# EAGLE board fnordlichtmini_v4 (EAGLE 6.1)
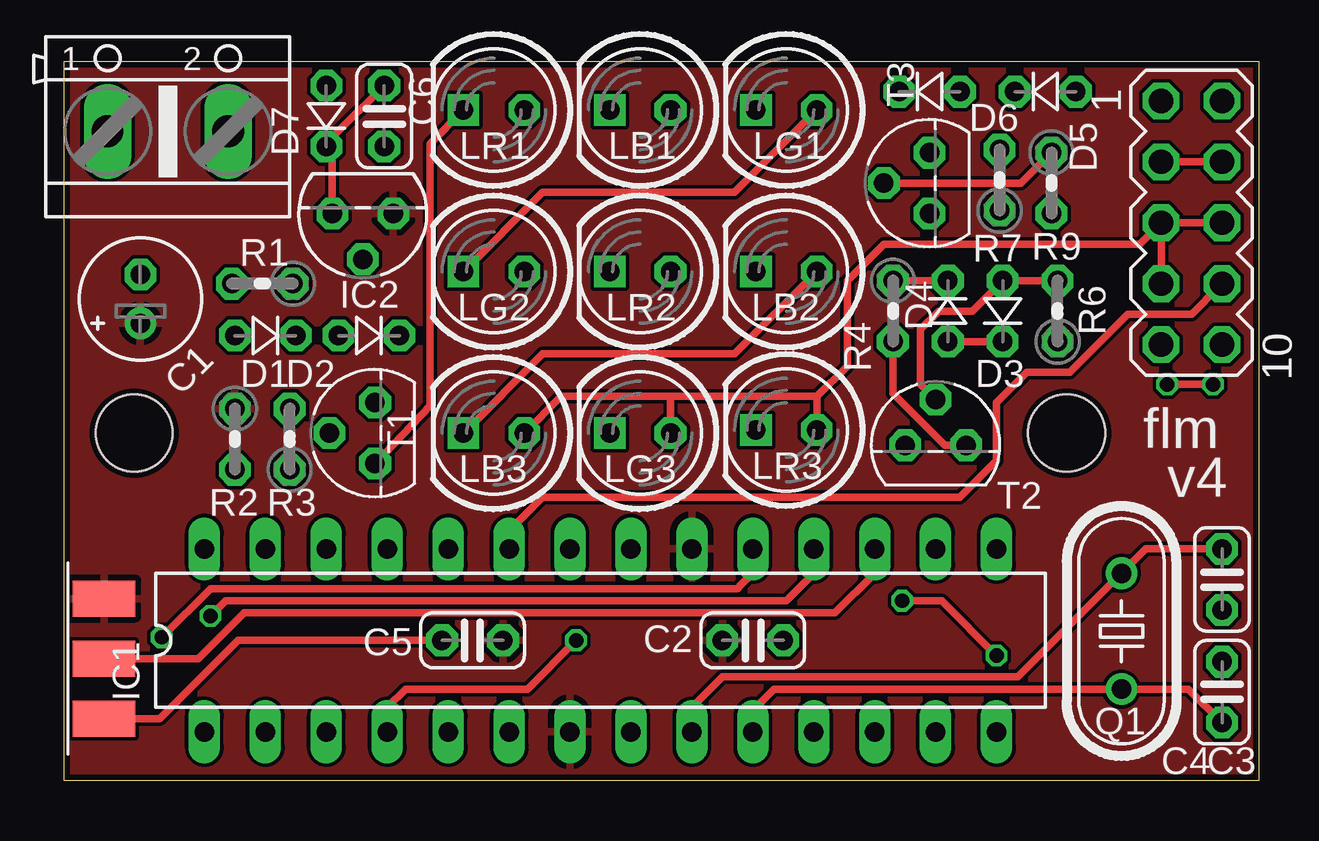
[diagram p0: board, top side]
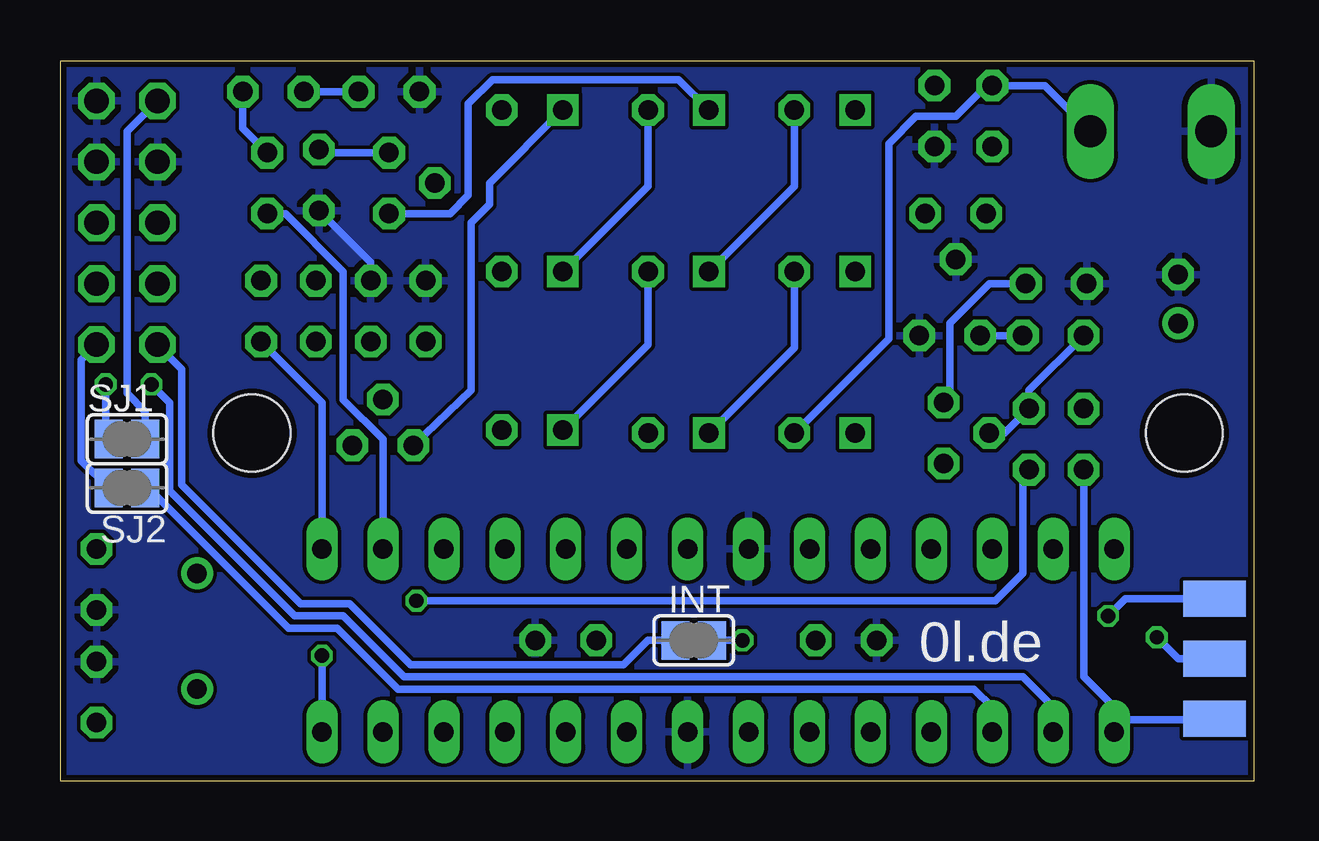
[diagram p1: board, bottom side, seen from below]

Size 49.78 x 29.97 mm. Coordinates in mm from the lower left corner, seen from the top.
Outline: 49.78,0 0,0 0,29.97 49.78,29.97 49.78,0
Copper layers (1*16): Top 0.035mm / dielectric 1.5mm / Bottom 0.035mm
Design rules: minimum track width 6mil, minimum drill 12mil, track to track 6mil, track to pad 6mil, pad to pad 6mil, via to via 6mil, smd to smd 0mil, copper to edge 10mil, drill to drill 10mil, minimum pad ring 10mil, minimum via ring 6mil, stop-mask expansion 2mil, vias tented up to drill 100mil, thermal gap 10mil
Holes 3.2 mm at 2.92,14.48 41.78,14.48

## Footprints (pad centres in the part's own frame; a part is rotated, then mirrored left to right if it is on the bottom)
E2-5 = drill 0.813 pad 1.27: + -1.016,0 | drill 0.813 pad 1.27 octagon: - 1.016,0
C025-024X044 = drill 0.813 octagon: 1 -1.27,0; 2 1.27,0
D-2.5 = drill 0.813 octagon: A 1.27,0; C -1.27,0
DIL28-3 = drill 0.813 long: 1 -16.51,-3.81; 2 -13.97,-3.81; 3 -11.43,-3.81; 4 -8.89,-3.81; 5 -6.35,-3.81; 6 -3.81,-3.81; 7 -1.27,-3.81; 8 1.27,-3.81; 9 3.81,-3.81; 10 6.35,-3.81; 11 8.89,-3.81; 12 11.43,-3.81; 13 13.97,-3.81; 14 16.51,-3.81; 15 16.51,3.81; 16 13.97,3.81; 17 11.43,3.81; 18 8.89,3.81; 19 6.35,3.81; 20 3.81,3.81; 21 1.27,3.81; 22 -1.27,3.81; 23 -3.81,3.81; 24 -6.35,3.81; 25 -8.89,3.81; 26 -11.43,3.81; 27 -13.97,3.81; 28 -16.51,3.81
TO92 = drill 0.813 octagon: 1 -1.27,0; 2 0,1.905; 3 1.27,0
SJ = smd 1.168 x 1.6: 1 -0.762,0; 2 0.762,0
LED5MM = drill 0.813 octagon: A -1.27,0 | drill 0.813 square: K 1.27,0
HC49U-V = drill 0.813: 1 -2.413,0; 2 2.413,0
0204V = drill 0.813 octagon: 1 -1.27,0; 2 1.27,0
MA05-2 = drill 1.016 octagon: 1 -5.08,-1.27; 2 -5.08,1.27; 3 -2.54,-1.27; 4 -2.54,1.27; 5 0,-1.27; 6 0,1.27; 7 2.54,-1.27; 8 2.54,1.27; 9 5.08,-1.27; 10 5.08,1.27
TO92' = drill 0.813 octagon: 1 1.27,0; 2 0,1.905; 3 -1.27,0
6PAD_ISP = smd 1.5 x 2.6: GND -2.5,0.5; MOSI 0,0.5; VCC 2.5,0.5 | smd 1.5 x 2.6 bottom: MISO 2.5,0.5; RST -2.5,0.5; SCK 0,0.5
AK500/2 = drill 1.321 long: 1 -2.515,0; 2 2.515,0

## Placement (x,y rotation side)
C1  47uF  [E2-5]  3.17,20.07 90 top
C2  100n  [C025-024X044]  28.7,5.84 0 top
C3  33p  [C025-024X044]  48.26,8.38 270 top
C4  33p  [C025-024X044]  48.26,3.68 90 top
C5  100n  [C025-024X044]  17.02,5.84 180 top
C6  100n  [C025-024X044]  13.34,27.69 270 top
D1  [D-2.5]  8.38,18.54 180 top
D2  [D-2.5]  12.7,18.54 180 top
D3  [D-2.5]  39.12,19.56 90 top
D4  [D-2.5]  36.83,19.56 270 top
D5  [D-2.5]  40.89,28.7 0 top
D6  [D-2.5]  36.07,28.7 0 top
D7  [D-2.5]  10.92,27.69 90 top
IC1  MEGA8-P  [DIL28-3]  22.35,5.84 0 top
IC2  78L05Z  [TO92]  12.45,23.62 180 top
INT  [SJ]  23.37,5.84 180 bottom
LB1  [LED5MM]  24,27.94 180 top
LB2  [LED5MM]  30.1,21.21 180 top
LB3  [LED5MM]  17.91,14.48 180 top
LG1  [LED5MM]  30.1,27.94 180 top
LG2  [LED5MM]  17.91,21.21 180 top
LG3  [LED5MM]  24,14.48 180 top
LR1  [LED5MM]  17.91,27.94 180 top
LR2  [LED5MM]  24,21.21 180 top
LR3  [LED5MM]  30.1,14.61 180 top
Q1  16MHz  [HC49U-V]  44.07,6.22 270 top
R1  33R  [0204V]  8.26,20.7 180 top
R2  2k2  [0204V]  7.11,14.22 270 top
R3  2k2  [0204V]  9.4,14.22 90 top
R4  33R  [0204V]  34.54,19.56 270 top
R6  2k2  [0204V]  41.4,19.56 90 top
R7  33R  [0204V]  38.99,25.02 90 top
R9  2k2  [0204V]  41.15,24.89 270 top
SJ1  [SJ]  46.99,14.22 0 bottom
SJ2  [SJ]  46.99,12.19 180 bottom
SV1  [MA05-2]  46.99,23.24 270 top
T1  bc550c  [TO92']  12.95,14.48 90 top
T2  bc550c  [TO92']  36.32,13.97 0 top
T3  bc550c  [TO92']  36.07,24.89 90 top
U$1  AVR-ISP-6-EDGE  [6PAD_ISP]  2.16,5.08 90 top
X1  [AK500/2]  4.32,27.05 0 top

## Library data of the parts
C1-C6 R1-R4 R6 R7 R9 = rcl
D1-D7 = diode
IC1 = atmel
IC2 = linear
INT SJ1 SJ2 = jumper
LB1-LB3 LG1-LG3 LR1-LR3 = led-mark
Q1 = crystal
SV1 = con-lstb
T1-T3 = transistor
U$1 = isp
X1 = con-ptr500

## Nets
+5V: C1.+ C2.1 C5.1 IC1.7 IC1.20 IC2.1 R2.1 U$1.VCC
+12V: D7.A LB3.A LG3.A LR3.A SV1.5 SV1.6 SV1.7 X1.2
ADC0: IC1.23 SV1.8
BLUE: IC1.16 R9.2
BLUE2: IC1.13
BUSINT: INT.2 SV1.9
DATA1: SJ2.2 SV1.10
DATA2: SJ1.2 SV1.1
GND: C1.- C2.2 C3.2 C4.2 C5.2 C6.2 D2.C D4.C D6.C IC1.8 IC1.22 IC2.2 R1.2 R4.1 R7.1 SV1.2 SV1.3 SV1.4 U$1.GND X1.1
GREEN: IC1.15 R6.1
GREEN2: IC1.12
INT0: IC1.4 INT.1
MISO: IC1.18 U$1.MISO
MOSI: IC1.17 U$1.MOSI
N$1: LR2.A LR3.K
N$2: LR1.A LR2.K
N$3: LR1.K T1.3
N$4: D1.C D2.A
N$5: R1.1 T1.1
N$7: D1.A R3.2 T1.2
N$8: LG2.A LG3.K
N$9: LG1.A LG2.K
N$10: LG1.K T2.3
N$11: D3.C D4.A
N$12: R4.2 T2.1
N$14: D3.A R6.2 T2.2
N$15: LB2.A LB3.K
N$16: LB1.A LB2.K
N$17: LB1.K T3.3
N$18: D5.C D6.A
N$19: R7.2 T3.1
N$21: D5.A R9.1 T3.2
N$22: C6.1 D7.C IC2.3
RED: IC1.14 R3.1
RED2: IC1.11
RST: IC1.1 R2.2 U$1.RST
RX: IC1.2 SJ1.1
SCK: IC1.19 U$1.SCK
TX: IC1.3 SJ2.1
XTAL1: C3.1 IC1.9 Q1.1
XTAL2: C4.1 IC1.10 Q1.2

## Tracks (layer width: path | path; a pad name or v marks a point on that pad's centre or on a via)
+5V
  pour Top: 0,29.97 49.78,29.97 49.78,0 0,0
+12V
  Top 0.305: LB3.A 20.7,16 25.27,16 | 25.27,16 LG3.A | 25.27,16 31.37,16 | 31.37,16 LR3.A | 31.37,16 32.64,17.27 32.64,20.83 34.16,22.35 44.83,22.35 SV1.5 | SV1.5 SV1.6 | SV1.5 SV1.7
  Bottom 0.305: X1.2 8.74,28.96 D7.A 11.18,28.96 12.45,27.69 14.1,27.69 15.24,26.54 15.24,18.41 LB3.A
ADC0
  Top 0.305: IC1.23 18.54,10.41 19.94,11.81 37.34,11.81 38.86,13.34 38.86,15.75 40.13,17.02 41.91,17.02 44.32,19.43 46.99,19.43 47.37,19.81 47.75,20.19 SV1.8
BLUE
  Bottom 0.305: IC1.16 36.32,14.22 37.97,15.88 37.97,21.21 40.39,23.62 R9.2
BUSINT
  Bottom 0.305: INT.2 25.27,5.84 26.29,4.83 31.75,4.83 35.18,4.83 37.72,7.37 39.75,7.37 44.7,12.32 44.7,17.14 SV1.9
DATA1
  Bottom 0.305: SV1.10 48.9,17.53 48.9,13.34 SJ2.2
DATA2
  Bottom 0.305: SV1.1 46.99,27.05 46.99,16.13 46.23,15.37 SJ1.2
GND
  Top 0.305: R4.1 D4.C | SV1.3 SV1.4 | U$1.GND 3.98,2.58 7.24,5.84 C5.2
  Bottom 0.305: R7.1 36.83,21.59 D4.C
  pour Bottom: 0,0 49.78,0 49.78,29.97 0,29.97
GREEN
  Bottom 0.305: R6.1 38.86,15.75 IC1.15
INT0  (via drill 0.6)
  Top 0.305: v21.34,5.84 19.3,3.81 14.22,3.81 13.46,3.05 IC1.4
  Bottom 0.305: INT.1 v21.34,5.84
MISO  (via drill 0.6)
  Top 0.305: IC1.18 31.24,8.64 30.1,7.49 6.73,7.49 v6.1,6.86
  Bottom 0.305: 2.67,7.62 1.57,7.62 U$1.MISO 5.37,7.58 v6.1,6.86
MOSI
  Top 0.305: IC1.17 33.78,8.64 32.13,6.99 31.11,6.99 7.49,6.99 5.59,5.08 U$1.MOSI
N$1
  Bottom 0.305: LR2.A 25.27,18.16 LR3.K
N$2
  Bottom 0.305: LR1.A 19.18,24.77 LR2.K
N$3
  Top 0.305: T1.3 15.24,15.62 15.24,26.54 LR1.K
N$4
  Bottom 0.305: D2.A D1.C
N$5
  Bottom 0.305: T1.1 12.7,16 12.7,19.05 11.05,20.7 R1.1
N$7
  Bottom 0.305: D1.A 9.4,16.26 R3.2 10.41,14.48 T1.2
N$8
  Bottom 0.305: LG2.A 19.18,18.03 LG3.K
N$9
  Top 0.305: LG2.K 19.94,24.51 27.94,24.51 LG1.A
N$10
  Bottom 0.305: T2.3 32.64,16.26 32.64,23.24 31.88,24 31.88,24.89 LG1.K
N$11
  Top 0.305: D4.A D3.C
N$12
  Top 0.305: T2.1 36.7,13.97 34.54,16.13 R4.2
N$14
  Top 0.305: T2.2 35.69,16.51 35.69,18.8 36.45,19.56 37.85,19.56 D3.A R6.2
N$15
  Top 0.305: LB3.K 19.94,17.78 27.94,17.78 LB2.A
N$16
  Bottom 0.305: LB1.A 25.27,24.77 LB2.K
N$17
  Bottom 0.305: LB1.K 24,29.21 31.75,29.21 32.77,28.19 32.77,24.38 33.53,23.62 T3.3
N$18
  Bottom 0.305: D6.A D5.C
N$19
  Bottom 0.305: R7.2 39.12,26.16 T3.1
N$21
  Top 0.305: R9.1 39.88,24.89 T3.2
  Bottom 0.305: D5.A 42.16,27.18 R9.1
N$22
  Top 0.305: IC2.3 11.18,26.16 11.18,26.29 | 11.18,26.29 11.18,26.8 C6.1 | D7.C 11.05,26.42 11.18,26.29
RED  (via drill 0.6)
  Top 0.305: v34.92,7.49 36.58,7.49 v38.86,5.21
  Bottom 0.305: IC1.14 v38.86,5.21 | v34.92,7.49 10.79,7.49 9.65,8.64 9.65,12.7 R3.1
RST
  Bottom 0.305: U$1.RST 1.52,2.54 5.84,2.54 | 5.84,2.54 IC1.1 | 5.84,2.54 IC1.1 | IC1.1 5.84,2.54 | 5.84,2.54 5.84,3.05 7.11,4.32 7.11,11.05 R2.2
RX  (via drill 0.6)
  Top 0.305: v45.97,16.51 v47.88,16.51
  Bottom 0.305: IC1.2 8.38,3.05 9.65,4.32 31.75,4.32 35.43,4.32 37.97,6.86 40.01,6.86 45.21,12.06 45.21,15.75 v45.97,16.51 | v47.88,16.51 47.88,14.35 SJ1.1
SCK  (via drill 0.6)
  Top 0.305: IC1.19 28.7,8.64 28.19,8.13 28.07,8 7.11,8 6.1,8 v4.06,5.97
  Bottom 0.305: v4.06,5.97 3.17,5.08 U$1.SCK
TX
  Bottom 0.305: IC1.3 10.92,3.05 11.68,3.81 31.75,3.81 35.69,3.81 38.23,6.35 40.26,6.35 46.1,12.19 SJ2.1
XTAL1
  Top 0.305: C3.1 45.09,9.65 Q1.1 39.75,4.32 30.61,4.32 27.43,4.32 26.16,3.05 IC1.9
XTAL2
  Top 0.305: C4.1 46.86,3.81 Q1.2 30.35,3.81 | 30.86,3.81 30.35,3.81 | 30.35,3.81 29.59,3.81 28.7,2.92 IC1.10

## Text on the board
tPlace: flm | v4
bPlace: 0l.de